# Altium PCB LKBulls2023.PcbDoc (part 2 of 2)
Units mm, origin at the board's own origin, x right, y up, seen from the top; angles counter-clockwise.
Board outline 150 x 145 mm, 2 copper layers (Top Layer, Bottom Layer), stack 1.586 mm thick; 120 components, 144 nets, 581 pads, 331 vias.
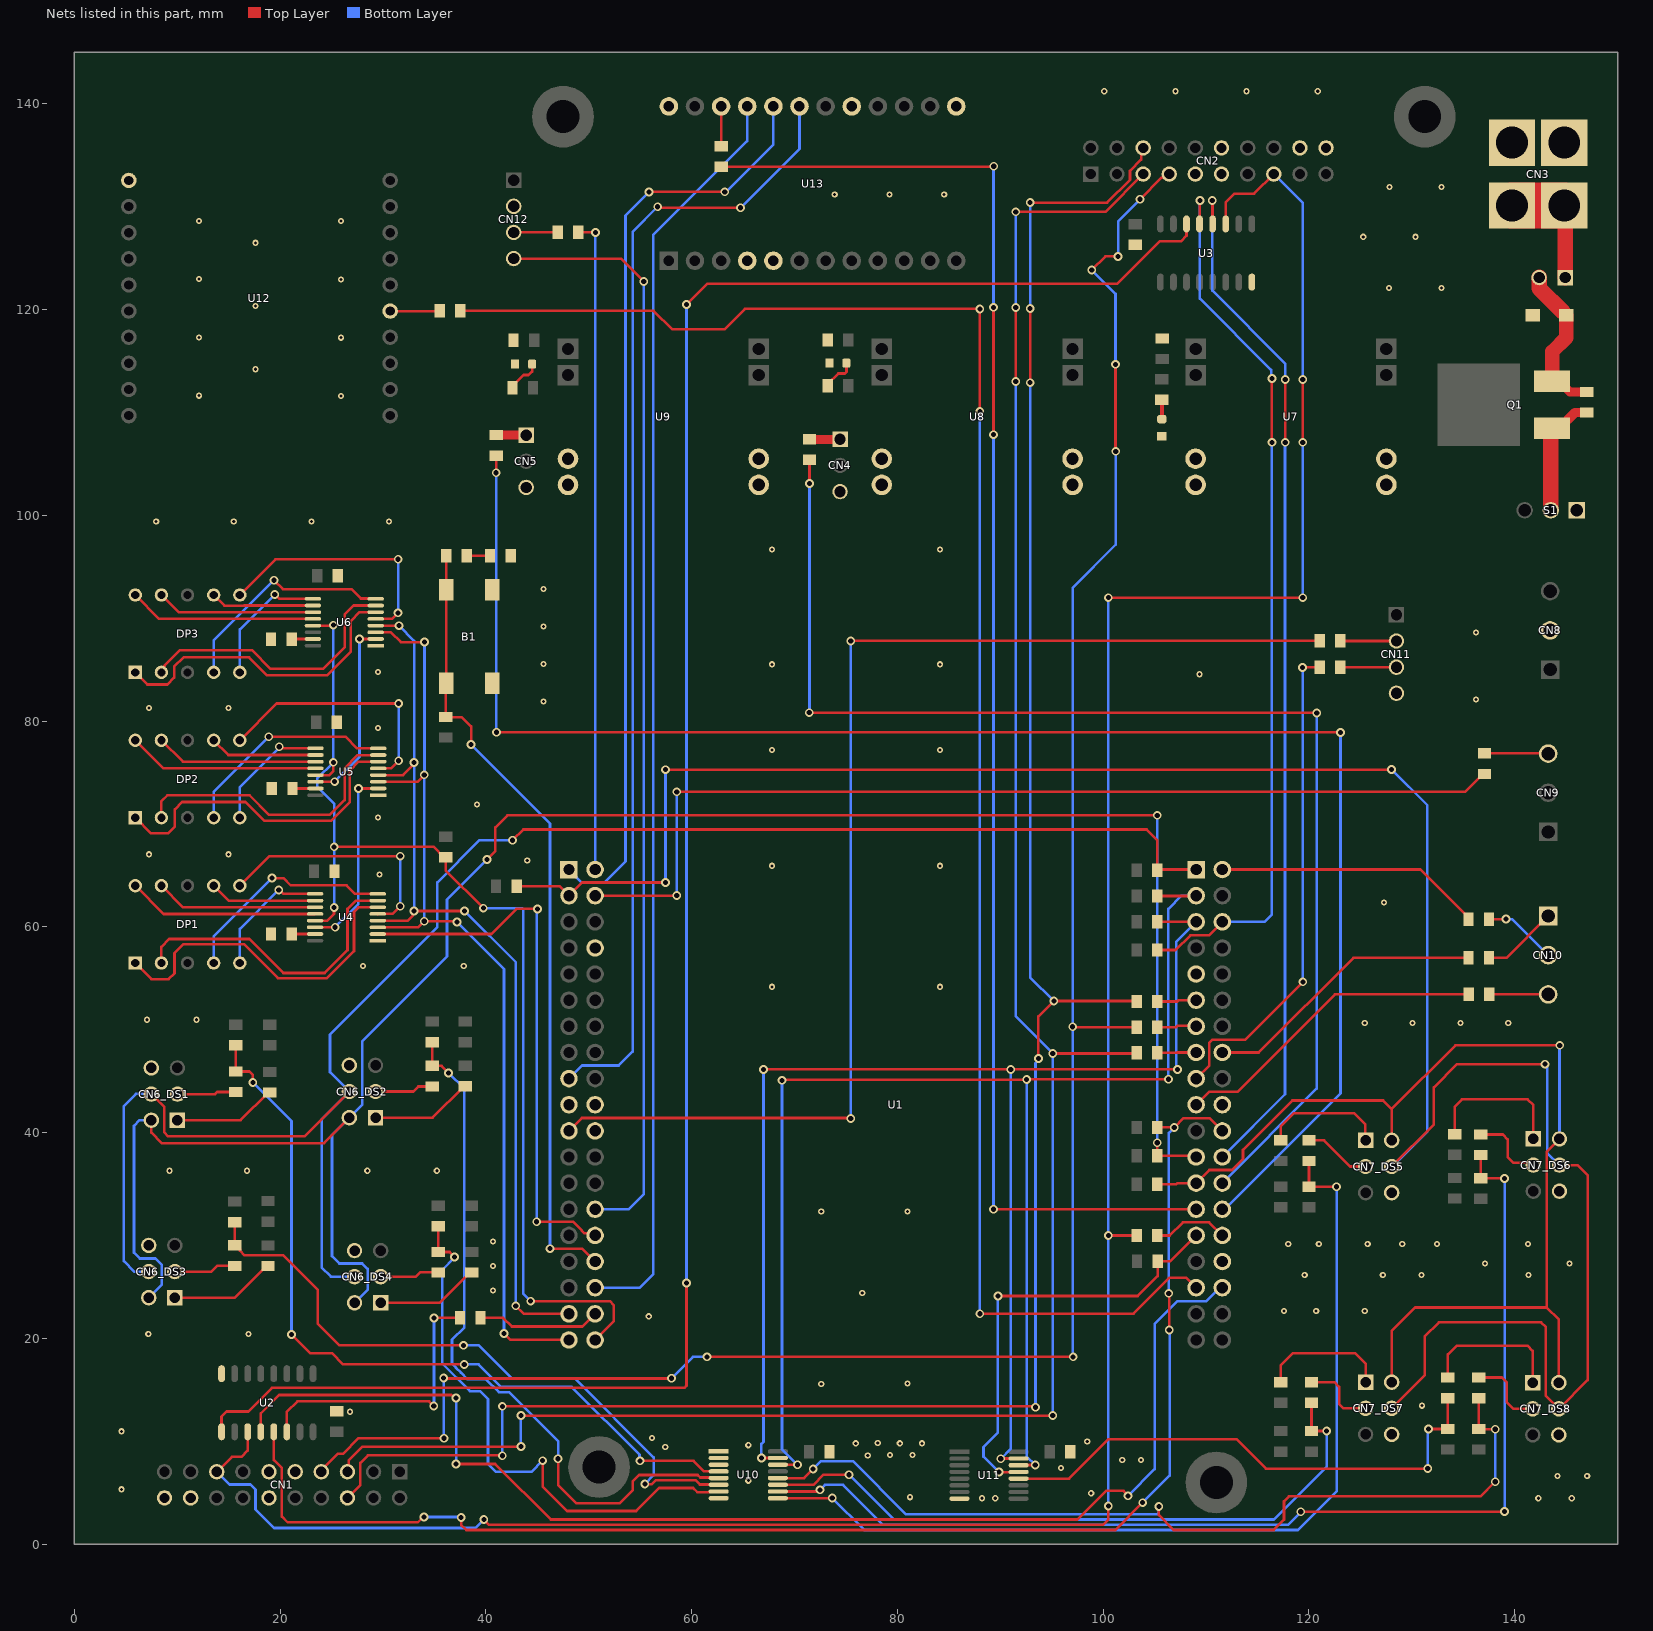
[diagram p2: the nets of this part, all layers, seen from the top]

## Via types
v1: diameter 0.85, hole 0.5, Top Layer to Bottom Layer, 172 vias
v2: diameter 0.6, hole 0.3, Top Layer to Bottom Layer, tented both sides, 121 vias
v3: diameter 0.85, hole 0.5, Top Layer to Bottom Layer, tented both sides, 38 vias

## Nets (pads, with @x,y where several pads share a name; then routed paths per layer and width w, separated by ;. In a path a pad name is that pad's centre, name@x,y a point inside that pad or via, vN(x,y) a via of type N, cw(c..) or ccw(c..) an arc to the next point about the centre after c; other vN are vias at no path point) (continued)
D\S\_\I\N\T\_\8\: R31_DS8.2 R33_DS8.2 U11.12 | length 51.3
  Top Layer w0.254: U11.12@91.775,6.375 96.683,6.375 100.512,10.204 112.961,10.204 115.824,7.341 131.521,7.341 v1(131.547,7.366) ; v1(131.623,11.201) R31_DS8.2@133.5,11.2 ; R31_DS8.2@133.5,11.2 R33_DS8.2@133.5,14.2
  Bottom Layer w0.254: v1(131.547,7.366) 131.547,11.125 v1(131.623,11.201)
D\S\_\X\S\D\N\_\1\: R28_DS1.2 R30_DS1.2 U10.4 | length 78.5
  Top Layer w0.254: R28_DS1.2@15.7,48.5 R30_DS1.2@15.7,45.95 15.85,45.95 17.017,45.95 17.348,45.618 v1(17.348,44.882) ; v1(21.107,20.371) 22.911,18.567 25.026,18.567 26.118,17.475 v1(37.897,17.475) ; v1(54.966,8.103) 60.19,8.103 61.218,7.075 U10.4@62.625,7.075
  Bottom Layer w0.254: v1(17.348,44.882) 21.107,41.123 v1(21.107,20.371) ; v1(37.897,17.475) 39.294,17.475 41.478,15.291 48.336,15.291 54.929,8.698 54.929,8.139 v1(54.966,8.103)
D\S\_\X\S\D\N\_\2\: R28_DS2.2 R30_DS2.2 U10.5 | length 69.4
  Top Layer w0.254: R28_DS2.2@34.8,48.8 34.8,46.493 R30_DS2.2@34.798,46.491 34.801,46.489 35.68,46.489 v1(36.373,45.796) ; v1(47.015,8.306) 47.015,5.74 48.793,3.962 52.984,3.962 54.28,5.258 54.28,6.131 54.88,6.731 60.586,6.731 60.834,6.484 61.681,6.484 61.707,6.457 62.593,6.457 U10.5@62.625,6.425
  Bottom Layer w0.254: v1(36.373,45.796) 37.897,44.272 37.897,21.08 36.703,19.886 36.703,17.551 37.091,17.164 37.091,17.141 37.563,16.669 37.585,16.669 38.231,16.024 40.027,16.024 41.268,14.783 42.257,14.783 47.015,10.024 v1(47.015,8.306)
D\S\_\X\S\D\N\_\3\: R28_DS3.2 R30_DS3.2 U10.6 | length 64
  Top Layer w0.254: R28_DS3.2@15.575,31.3 R30_DS3.2@15.575,29.05 15.725,29.05 16.098,28.677 16.098,28.527 16.558,28.067 20.32,28.067 23.647,24.74 23.647,21.463 25.781,19.329 v1(37.821,19.329) ; v1(55.448,5.842) 55.474,5.817 56.109,5.817 56.515,6.223 60.376,6.223 60.792,5.807 62.593,5.807 U10.6@62.625,5.775
  Bottom Layer w0.254: v1(37.821,19.329) 39.319,19.329 42.545,16.104 48.638,16.104 56.312,8.43 56.312,6.706 v1(55.448,5.842)
D\S\_\X\S\D\N\_\4\: R28_DS4.2 R30_DS4.2 U10.7 | length 55.1
  Top Layer w0.254: R28_DS4.2@35.35,30.9 R30_DS4.2@35.35,28.4 36.472,28.4 v1(36.957,27.915) ; v1(45.517,8.123) 45.517,5.588 47.879,3.226 54.61,3.226 56.845,5.461 60.147,5.461 60.542,5.066 61.681,5.066 61.707,5.093 62.593,5.093 U10.7@62.625,5.125
  Bottom Layer w0.254: v1(36.957,27.915) 36.957,27.864 35.756,26.663 35.756,17.584 38.456,14.884 39.421,14.884 40.208,14.097 40.208,7.798 40.97,7.036 44.429,7.036 v1(45.517,8.123)
D\S\_\X\S\D\N\_\5\: R32_DS5.2 R34_DS5.2 U10.9 | length 92
  Top Layer w0.254: U10.9@68.375,4.475 73.639,4.475 v1(73.66,4.496) ; R34_DS5.2@120,37.25 R32_DS5.2@120,34.75 120.003,34.747 v1(122.682,34.747)
  Bottom Layer w0.254: v1(73.66,4.496) 76.775,1.381 118.932,1.381 122.682,5.131 v1(122.682,34.747)
D\S\_\X\S\D\N\_\6\: R32_DS6.2 R34_DS6.2 U10.10 | length 110
  Top Layer w0.254: U10.10@68.375,5.125 72.147,5.125 72.305,5.283 v1(72.466,5.283) ; v1(119.202,3.15) 138.989,3.15 v1(139.014,3.175) ; R34_DS6.2@136.699,37.825 R32_DS6.2@136.699,35.575 136.713,35.56 138.989,35.56 v1(139.014,35.535)
  Bottom Layer w0.254: v1(72.466,5.283) 72.949,5.766 74.727,5.766 78.604,1.889 117.942,1.889 v1(119.202,3.15) ; v1(139.014,3.175) v1(139.014,35.535)
D\S\_\X\S\D\N\_\7\: R32_DS7.2 R34_DS7.2 U10.11 | length 65.4
  Top Layer w0.254: U10.11@68.375,5.775 71.818,5.775 72.8,6.756 v1(75.286,6.756) ; R34_DS7.2@120.25,13.75 R32_DS7.2@120.25,11 120.252,10.998 v1(121.717,10.998)
  Bottom Layer w0.254: v1(75.286,6.756) 79.645,2.397 116.595,2.397 121.717,7.518 v1(121.717,10.998)
D\S\_\X\S\D\N\_\8\: R32_DS8.2 R34_DS8.2 U10.12 | length 87.3
  Top Layer w0.254: U10.12@68.375,6.425 70.916,6.425 v1(71.806,7.315) ; v1(105.41,3.658) 105.41,2.819 106.848,1.381 116.57,1.381 117.577,2.388 117.577,4.166 118.059,4.648 136.677,4.648 v1(138.1,6.071) ; R34_DS8.2@136.5,14.2 R32_DS8.2@136.5,11.2 136.524,11.176 v1(138.1,11.176)
  Bottom Layer w0.254: v1(71.806,7.315) 72.568,8.077 75.667,8.077 80.839,2.905 105.233,2.905 105.382,3.054 105.382,3.63 v1(105.41,3.658) ; v1(138.1,6.071) v1(138.1,11.176)
D_DP_1: DP1.5 U4.9 | length 12.3
  Top Layer w0.254: v1(19.863,63.576) 19.943,63.576 20.31,63.21 U4.9@23.391,63.21
  Bottom Layer w0.254: DP1.5@16.08,56.49 16.08,59.793 v1(19.863,63.576)
D_DP_2: DP2.5 U5.9 | length 12.1
  Top Layer w0.254: v1(19.914,77.513) 20.075,77.513 20.231,77.357 U5.9@23.434,77.357
  Bottom Layer w0.254: DP2.5@16.08,70.615 16.08,73.586 19.914,77.419 v1(19.914,77.513)
D_DP_3: DP3.5 U6.9 | length 12.9
  Top Layer w0.254: v1(19.482,92.304) 19.511,92.304 19.929,91.886 U6.9@23.188,91.886
  Bottom Layer w0.254: DP3.5@16.08,84.74 16.08,88.902 v1(19.482,92.304)
E_DP_1: DP1.4 U4.8 | length 21.5
  Top Layer w0.254: v1(19.202,64.745) 20.32,64.745 21.031,64.033 26.467,64.033 27.291,63.21 U4.8@29.491,63.21
  Bottom Layer w0.254: DP1.4@13.54,56.49 13.54,59.082 v1(19.202,64.745)
E_DP_2: DP2.4 U5.8 | length 21.2
  Top Layer w0.254: v1(18.898,78.486) 26.34,78.486 27.468,77.357 U5.8@29.534,77.357
  Bottom Layer w0.254: DP2.4@13.54,70.615 13.54,73.128 v1(18.898,78.486)
E_DP_3: DP3.4 U6.8 | length 22
  Top Layer w0.254: v1(19.406,93.701) 19.406,93.69 20.259,92.837 26.924,92.837 27.838,91.923 28.559,91.923 28.577,91.905 29.27,91.905 U6.8@29.288,91.886
  Bottom Layer w0.254: DP3.4@13.54,84.74 13.54,87.86 19.38,93.701 v1(19.406,93.701)
F_DP_1: DP1.2 U4.7 | length 29.6
  Top Layer w0.254: DP1.2@8.46,56.49 8.46,58.066 9.22,58.826 17.018,58.826 20.32,55.524 24.333,55.524 26.543,57.734 26.543,61.747 27.355,62.56 U4.7@29.491,62.56
F_DP_2: DP2.2 U5.7 | length 27.9
  Top Layer w0.254: DP2.2@8.46,70.615 8.46,72.214 9.042,72.796 17.018,72.796 18.923,70.891 24.816,70.891 26.264,72.339 26.264,75.413 27.54,76.689 29.516,76.689 U5.7@29.534,76.707
F_DP_3: DP3.2 U6.7 | length 27.1
  Top Layer w0.254: DP3.2@8.46,84.74 8.46,85.023 8.759,85.322 8.759,85.391 10.262,86.893 17.272,86.893 19.075,85.09 24.184,85.09 26.264,87.169 26.264,90.348 27.152,91.236 U6.7@29.288,91.236
G_DP_1: DP1.1 U4.6 | length 33.3
  Top Layer w0.254: DP1.1@5.92,56.49 7.495,54.915 9.169,54.915 9.728,55.474 9.728,57.455 10.592,58.318 16.485,58.318 19.787,55.016 24.544,55.016 27.178,57.651 27.178,61.468 27.62,61.91 U4.6@29.491,61.91
G_DP_2: DP2.1 U5.6 | length 31.4
  Top Layer w0.254: DP2.1@5.92,70.615 7.447,69.088 9.093,69.088 9.757,69.752 9.757,71.429 10.465,72.136 16.637,72.136 18.466,70.307 24.95,70.307 26.772,72.129 26.772,75.202 27.627,76.057 U5.6@29.534,76.057
G_DP_3: DP3.1 U6.6 | length 30.6
  Top Layer w0.254: DP3.1@5.92,84.74 7.094,83.566 9.042,83.566 9.703,84.226 9.703,85.293 10.614,86.204 16.996,86.204 18.745,84.455 24.536,84.455 26.873,86.792 26.873,89.746 27.713,90.586 U6.6@29.288,90.586
GND: B1.1 B1.2 C2.1 C3.1 C4.1 C5.1 C6.1 C7.1 C8.1 C9.1 C10.1 C11.1 CN1.9 CN1.11 CN1.12 CN1.18 CN1.20 CN2.9 CN2.11 CN2.12 CN2.18 CN2.20 CN3.2 CN4.3 CN5.3 CN6_DS1.6 CN6_DS2.6 CN6_DS3.6 CN6_DS4.6 CN7_DS5.6 CN7_DS6.6 CN7_DS7.6 CN7_DS8.6 CN8.2 CN11.4 CN12.2 D1.K D2.A D3.K D4.K R2.2 R11.2 R12.2 R13.2 S1.1 U1.8 U1.19 U1.20 U1.22 U1.47 U1.58 U1.70 U2.8 U3.8 U4.1 U5.1 U6.1 U7.1 U7.2 U7.5 U7.6 U8.1 U8.2 U8.5 U8.6 U9.1 U9.2 U9.5 U9.6 U10.1 U10.2 U10.3 U10.8 U11.8 U12.1 U13.4 U13.5 U13.13 U13.17 U13.24
  other v2: 88.214,4.47 89.51,4.47 142.291,4.47 145.542,4.47 81.229,4.572 98.831,4.953 4.572,5.334 65.507,6.172 144.17,6.629 147.041,6.629 95.91,7.417 101.854,8.179 103.657,8.179 77.114,8.636 79.286,8.661 81.458,8.661 57.429,9.449 65.507,9.623 75.946,9.804 80.23,9.804 82.372,9.804 78.088,9.83 98.45,9.982 56.159,10.338 4.572,10.973 26.797,12.878 130.988,13.462 72.593,15.57 80.975,15.621 7.188,20.447 16.916,20.447 55.829,22.149 117.577,22.682 120.701,22.682 125.425,22.682 76.581,24.409 40.691,24.663 119.583,26.162 127.178,26.162 130.937,26.162 141.351,26.162 40.691,27.038 137.109,27.28 145.313,27.28 117.983,29.185 120.955,29.185 125.705,29.185 129.07,29.185 132.436,29.185 141.275,29.185 40.691,29.413 72.593,32.334 80.975,32.334 9.246,36.297 16.789,36.297 28.473,36.297 35.23,36.297 125.425,50.673 130.073,50.673 134.722,50.673 139.37,50.673 7.061,50.978 11.862,50.978 67.818,54.178 84.15,54.178 28.067,56.21 37.846,56.21 127.279,62.357 29.642,65.1 67.818,65.938 84.15,65.938 44.018,66.446 7.264,67.056 14.986,67.056 29.515,70.637 39.141,71.882 67.818,77.191 84.15,77.191 29.515,79.324 7.264,81.28 14.986,81.28 45.593,81.915 136.22,82.093 109.347,84.557 29.515,84.785 67.818,85.522 84.15,85.522 45.593,85.556 136.22,88.621 45.593,89.196 45.593,92.837 67.818,96.672 84.15,96.672 7.95,99.412 15.494,99.412 23.038,99.412 30.582,99.412 25.908,111.608 12.116,111.633 17.602,114.198 25.908,117.272 12.116,117.297 17.602,120.345 127.787,122.098 132.867,122.098 25.908,122.936 12.116,122.961 17.602,126.492 125.273,127.076 130.353,127.076 25.908,128.6 12.116,128.626 73.901,131.191 79.223,131.191 84.544,131.191 127.813,131.902 132.893,131.902 100.101,141.224 107.019,141.224 113.936,141.224 120.853,141.224
NetC1_1: C1.1 R2.1 | length 2.3
  Top Layer w0.254: C1.1@38.135,96.088 R2.1@40.402,96.088
NetCN1_5: CN1.5 CN2.5 R5.1 | length 213.7
  Top Layer w0.254: CN1.5@26.54,7.04 26.671,7.171 26.671,8.171 27.963,9.463 43.363,9.463 v3(43.4,9.5) ; v3(43.4,12.5) v3(95.1,12.5) ; v3(91.5,113) v3(91.5,120.2) ; v3(91.5,129.5) 100.205,129.5 CN2.5@103.88,133.175 ; v3(95.1,47.7) 103.2,47.7 R5.1@103.25,47.75
  Bottom Layer w0.254: v3(43.4,9.5) v3(43.4,12.5) ; v3(91.5,113) 91.5,51.3 v3(95.1,47.7) 95.084,47.684 95.084,12.516 v3(95.1,12.5) ; v3(91.5,120.2) v3(91.5,129.5)
NetCN1_6: CN1.6 CN2.6 R7.1 | length 215.8
  Top Layer w0.254: CN1.6@26.54,4.5 27.8,5.76 27.8,7.9 28.528,8.628 41.572,8.628 v3(41.6,8.6) ; v3(41.6,13.4) 93.331,13.4 v3(93.421,13.31) ; v3(92.9,112.9) v3(92.9,120.1) ; v3(92.9,130.4) 100.387,130.4 102.6,132.613 102.6,133.494 103.69,134.584 103.69,135.525 CN2.6@103.88,135.715 ; v3(93.7,47.2) 93.7,51.3 v3(95.2,52.8) 103.2,52.8 R7.1@103.25,52.75
  Bottom Layer w0.254: v3(41.6,8.6) v3(41.6,13.4) ; v3(92.9,112.9) 92.9,55.1 v3(95.2,52.8) ; v3(92.9,120.1) v3(92.9,130.4) ; v3(93.421,13.31) 93.421,46.76 93.7,47.039 v3(93.7,47.2)
NetCN1_7: CN1.7 CN2.7 R6.1 | length 209.3
  Top Layer w0.254: CN1.7@24,7.04 24,7.199 25.589,8.788 26.088,8.788 27.612,10.312 35.908,10.312 v1(35.916,10.305) ; v1(35.89,16.154) 35.941,16.104 58.014,16.104 v1(58.039,16.129) ; v1(61.484,18.212) v1(97.079,18.212) ; v1(97.028,50.292) 97.07,50.25 R6.1@103.25,50.25 ; v1(98.882,123.85) 100.203,125.171 v1(101.448,125.171) ; v1(101.194,114.681) 101.194,106.248 v1(101.219,106.223) ; v1(103.585,130.72) 105.684,132.819 105.727,132.819 106.083,133.175 CN2.7@106.42,133.175
  Bottom Layer w0.254: v1(35.89,16.154) 35.916,16.129 v1(35.916,10.305) ; v1(58.039,16.129) 60.122,18.212 v1(61.484,18.212) ; v1(97.079,18.212) 97.028,18.263 97.028,92.964 101.219,97.155 v1(101.219,106.223) ; v1(98.882,123.85) 101.194,121.539 v1(101.194,114.681) ; v1(101.448,125.171) 101.448,128.583 v1(103.585,130.72)
NetCN1_15: CN1.15 CN2.15 R4.1 U2.11 U3.11 | length 258
  Top Layer w0.254: CN1.15@13.84,7.04 15.3,8.5 16.254,8.5 16.845,9.091 U2.11@16.845,10.925 ; v1(39.8,2.4) 39.803,2.4 40.314,1.889 99.986,1.889 100.508,2.41 100.508,3.703 v1(100.5,3.711) ; v1(100.5,30) R4.1@103.25,30 ; v1(100.5,92) v1(119.4,92) ; U3.11@111.905,128.325 111.905,130.412 112.759,131.266 114.671,131.266 CN2.15@116.58,133.175 ; v1(119.4,107.1) v1(119.4,113.2)
  Bottom Layer w0.254: CN1.15@13.84,7.04 15.08,5.8 17.1,5.8 17.6,5.3 17.6,3.38 19.406,1.575 38.975,1.575 v1(39.8,2.4) ; v1(100.5,3.711) v1(100.5,92) ; CN2.15@116.58,133.175 119.4,130.355 v1(119.4,113.2) ; v1(119.4,92) v1(119.4,107.1)
NetCN3_1: CN3.1 F1.1 | length 12.1
  Top Layer w1.499: F1.1@144.907,123.114 CN3.1@144.907,130.035
  Top Layer w1.524: CN3.1@144.815,130.127 CN3.1@144.907,130.035
  Top Layer w4.445: CN3.1@139.735,130.127 CN3.1@144.815,130.127
NetCN4_1: CN4.1 R18.2 | length 3
  Top Layer w0.889: R18.2@71.45,107.401 71.46,107.391 CN4.1@74.422,107.391
NetCN5_1: CN5.1 R19.2 | length 3
  Top Layer w0.889: R19.2@40.98,107.798 CN5.1@43.917,107.798 ; R19.2@41.021,107.832 R19.2@41.056,107.798
NetCN6_DS1_1: CN6_DS1.1 R29_DS1.1 | length 10.1
  Top Layer w0.254: CN6_DS1.1@10.02,41.21 16.16,41.21 18.85,43.9 R29_DS1.1@19,43.9
NetCN6_DS1_2: CN6_DS1.2 CN6_DS2.2 CN6_DS3.2 CN6_DS4.2 R23.1 U1.61 | length 200.9
  Top Layer w0.254: CN6_DS1.2@7.48,41.21 7.48,39.993 8.484,38.989 24.259,38.989 CN6_DS2.2@26.73,41.46 ; v1(40.107,66.548) 40.919,67.361 40.919,69.672 42.088,70.841 v1(105.258,70.841) ; v1(105.258,39.014) 105.258,37.758 R23.1@105.25,37.75 108.92,37.75 U1.61@109.035,37.635
  Bottom Layer w0.254: CN6_DS3.2@7.23,23.96 8.509,25.239 8.509,27.127 7.866,27.77 6.368,27.77 5.791,28.346 5.791,40.665 6.336,41.21 CN6_DS1.2@7.48,41.21 ; CN6_DS4.2@27.23,23.46 28.499,24.729 28.499,26.75 27.969,27.28 25.756,27.28 25.044,27.991 25.044,39.774 CN6_DS2.2@26.73,41.46 27.991,42.721 27.991,48.895 36.22,57.125 36.22,62.662 v1(40.107,66.548) ; v1(105.258,39.014) v1(105.258,70.841) v1@105.283,70.866
NetCN6_DS1_3: CN6_DS1.3 R30_DS1.1 | length 5.8
  Top Layer w0.254: CN6_DS1.3@10.02,43.75 13.676,43.75 13.876,43.95 R30_DS1.1@15.7,43.95
NetCN6_DS1_4: CN6_DS1.4 CN6_DS2.4 CN6_DS3.4 CN6_DS4.4 R22.1 U1.39 | length 171.8
  Top Layer w0.254: CN6_DS1.4@7.48,43.75 8.738,42.492 8.738,40.03 9.119,39.649 22.379,39.649 CN6_DS2.4@26.73,44 ; v1(42.596,68.428) 43.637,69.469 104.216,69.469 105.25,68.435 R22.1@105.25,65.5 105.325,65.575 U1.39@109.035,65.575
  Bottom Layer w0.254: CN6_DS3.4@7.23,26.5 5.809,26.5 4.801,27.508 4.801,42.57 5.994,43.764 7.466,43.764 CN6_DS1.4@7.48,43.75 ; CN6_DS4.4@27.23,26 24.933,26 24.028,26.905 24.028,41.298 CN6_DS2.4@26.73,44 24.841,45.889 24.841,49.53 35.281,59.969 35.281,64.338 39.37,68.428 v1(42.596,68.428)
NetCN6_DS2_1: CN6_DS2.1 R29_DS2.1 | length 10
  Top Layer w0.254: CN6_DS2.1@29.27,41.46 34.81,41.46 37.85,44.5 R29_DS2.1@38,44.5
NetCN6_DS2_3: CN6_DS2.3 R30_DS2.1 | length 5.8
  Top Layer w0.254: CN6_DS2.3@29.27,44 32.951,44 33.442,44.491 R30_DS2.1@34.798,44.491 R30_DS2.1@34.773,44.467
NetCN6_DS3_1: CN6_DS3.1 R29_DS3.1 | length 10.3
  Top Layer w0.254: CN6_DS3.1@9.77,23.96 15.59,23.96 18.671,27.042 R29_DS3.1@18.821,27.042
NetCN6_DS3_3: CN6_DS3.3 R30_DS3.1 | length 6
  Top Layer w0.254: CN6_DS3.3@9.77,26.5 13.317,26.5 13.868,27.051 R30_DS3.1@15.575,27.05 R30_DS3.1@15.575,27.05
NetCN6_DS4_1: CN6_DS4.1 R29_DS4.1 | length 10.1
  Top Layer w0.254: CN6_DS4.1@29.77,23.46 35.511,23.46 38.458,26.407 R29_DS4.1@38.608,26.407
NetCN6_DS4_3: CN6_DS4.3 R30_DS4.1 | length 5.8
  Top Layer w0.254: CN6_DS4.3@29.77,26 33.188,26 33.604,26.416 35.334,26.416 R30_DS4.1@35.35,26.4
NetCN7_DS5_1: CN7_DS5.1 R33_DS5.1 | length 12.1
  Top Layer w0.254: R33_DS5.1@117.25,39.25 117.25,40.618 118.516,41.885 124.409,41.885 125.476,40.818 125.476,39.274 CN7_DS5.1@125.5,39.25
NetCN7_DS5_2: CN7_DS5.2 CN7_DS6.2 CN7_DS7.2 CN7_DS8.2 R25.1 U1.63 | length 103.7
  Top Layer w0.254: R25.1@105.25,35 107.111,35 107.206,35.095 U1.63@109.035,35.095 110.313,36.373 112.497,36.373 113.585,37.461 113.585,38.325 118.389,43.129 127.203,43.129 128.04,42.292 ; CN7_DS7.2@128.04,15.75 128.04,20.725 130.327,23.012 143.104,23.012 ; CN7_DS5.2@128.04,39.25 128.04,42.292 ; CN7_DS8.2@144.29,15.7 144.29,21.303 144.29,21.826 143.104,23.012 ; CN7_DS6.2@144.35,39.39 143.104,38.144 143.104,23.012 ; v1(144.374,48.489) 134.236,48.489 128.04,42.292
  Bottom Layer w0.254: CN7_DS6.2@144.35,39.39 144.35,48.465 v1(144.374,48.489)
NetCN7_DS5_3: CN7_DS5.3 R34_DS5.1 | length 6.6
  Top Layer w0.254: R34_DS5.1@120,39.25 121.456,39.25 123.996,36.71 CN7_DS5.3@125.5,36.71
NetCN7_DS5_4: CN7_DS5.4 CN7_DS6.4 CN7_DS7.4 CN7_DS8.4 R24.1 U1.3 | length 226.6
  Top Layer w0.254: R24.1@42.986,63.957 47.153,63.957 U1.3@48.075,63.035 49.353,64.313 v1(57.455,64.313) ; v1(57.455,75.286) 127.991,75.286 v1(128.016,75.311) ; CN7_DS7.4@128.04,13.21 131.242,16.412 131.242,20.168 132.639,21.565 142.57,21.565 143.027,21.107 143.027,14.423 CN7_DS8.4@144.29,13.16 147.091,15.961 147.091,35.865 146.106,36.85 CN7_DS6.4@144.35,36.85 ; CN7_DS5.4@128.04,36.71 132.131,40.801 132.131,44.399 134.391,46.66 v1(142.951,46.66)
  Bottom Layer w0.254: v1(57.455,64.313) v1(57.455,75.286) ; v1(128.016,75.311) 131.496,71.831 131.496,40.081 128.125,36.71 CN7_DS5.4@128.04,36.71 ; CN7_DS7.4@128.04,13.21 CN7_DS7.4@128.297,13.21 ; v1(142.951,46.66) 142.951,46.499 143.154,46.295 143.154,38.046 CN7_DS6.4@144.35,36.85
NetCN7_DS6_1: CN7_DS6.1 R33_DS6.1 | length 14.1
  Top Layer w0.254: R33_DS6.1@134.162,39.85 134.162,42.518 134.874,43.231 141.249,43.231 141.81,42.67 CN7_DS6.1@141.81,39.39
NetCN7_DS6_3: CN7_DS6.3 R34_DS6.1 | length 7.4
  Top Layer w0.254: R34_DS6.1@136.699,39.825 138.835,39.825 139.319,39.341 139.319,37.617 139.869,37.067 141.593,37.067 CN7_DS6.3@141.81,36.85
NetCN7_DS7_1: CN7_DS7.1 R33_DS7.1 | length 12.6
  Top Layer w0.254: R33_DS7.1@117.25,15.75 117.25,17.377 118.415,18.542 124.511,18.542 125.5,17.553 CN7_DS7.1@125.5,15.75
NetCN7_DS7_3: CN7_DS7.3 R34_DS7.1 | length 7.3
  Top Layer w0.254: R34_DS7.1@120.25,15.75 122.477,15.75 122.936,15.291 122.936,13.614 123.34,13.21 CN7_DS7.3@125.5,13.21
NetCN7_DS8_1: CN7_DS8.1 R33_DS8.1 | length 14.1
  Top Layer w0.254: R33_DS8.1@133.5,16.2 133.5,18.438 134.366,19.304 141.224,19.304 141.75,18.778 CN7_DS8.1@141.75,15.7
NetCN7_DS8_3: CN7_DS8.3 R34_DS8.1 | length 7.6
  Top Layer w0.254: R34_DS8.1@136.5,16.2 138.765,16.2 139.217,15.748 139.217,13.843 139.9,13.16 CN7_DS8.3@141.75,13.16
NetCN9_3: CN9.3 R35.2 | length 6.2
  Top Layer w0.254: R35.2@137.058,76.87 CN9.3@143.227,76.87
NetCN10_1: CN10.1 R36.2 | length 7.4
  Top Layer w0.254: R36.2@137.5,57 139.19,57 CN10.1@143.25,61.06
NetCN10_2: CN10.2 R37.2 | length 7.2
  Top Layer w0.254: R37.2@137.507,60.757 v1(139.141,60.757)
  Bottom Layer w0.254: v1(139.141,60.757) 139.743,60.757 CN10.2@143.25,57.25
NetCN10_3: CN10.3 R38.2 | length 5.7
  Top Layer w0.254: R38.2@137.527,53.44 CN10.3@143.25,53.44
NetCN11_2: CN11.2 R39.2 | length 5.4
  Top Layer w0.254: R39.2@123.065,87.79 CN11.2@128.5,87.79
NetCN11_3: CN11.3 R40.2 | length 5.5
  Top Layer w0.254: R40.2@123.047,85.242 123.055,85.25 CN11.3@128.5,85.25
NetCN12_3: CN12.3 R42.2 | length 4.3
  Top Layer w0.254: CN12.3@42.7,127.5 R42.2@46.973,127.5
NetCN12_4: CN12.4 U1.28 | length 107.6
  Top Layer w0.254: CN12.4@42.7,124.96 53.119,124.96 v1(55.347,122.733)
  Bottom Layer w0.254: U1.28@50.615,32.555 53.84,32.555 55.347,34.061 v1(55.347,122.733)
NetD1_1: D1.A R14.1 | length 1.9
  Top Layer w0.406: D1.A@105.7,109.35 R14.1@105.7,111.225
NetD2_K: D2.K F1.2 Q1.3 R15.2 | length 15.6
  Top Layer w0.889: Q1.3@143.612,113.036 144.322,113.036 145.358,112 R15.2@147,112
  Top Layer w1.016: D2.K@144.704,119.736 144.729,119.736 D2.K@145.009,119.456
  Top Layer w1.397: Q1.3@143.612,113.036 143.662,113.086 143.662,113.665 143.662,115.926 145.009,117.272 D2.K@145.009,119.456
  Top Layer w1.524: F1.2@142.367,123.114 142.367,122.072 D2.K@144.704,119.736
NetD3_1: D3.A R16.1 | length 3.3
  Top Layer w0.254: R16.1@73.219,112.598 73.219,112.748 74.263,113.792 74.895,113.792 75.044,113.941 D3.A@75.044,114.808
NetD4_1: D4.A R17.1 | length 3.3
  Top Layer w0.254: R17.1@42.586,112.42 R17.1@42.661,112.495 ; R17.1@42.586,112.57 43.656,113.64 44.145,113.64 44.488,113.982 D4.A@44.488,114.706
NetDP1_6: DP1.6 U4.5 | length 24.1
  Top Layer w0.254: DP1.6@16.08,64.01 18.948,66.878 v1(31.674,66.878) ; U4.5@29.491,61.26 29.497,61.265 30.937,61.265 v1(31.674,62.001)
  Bottom Layer w0.254: v1(31.674,62.001) v1(31.674,66.878)
NetDP1_7: DP1.7 U4.10 | length 10.5
  Top Layer w0.254: DP1.7@13.54,64.01 14.99,62.56 U4.10@23.391,62.56
NetDP1_9: DP1.9 U4.11 | length 15.8
  Top Layer w0.254: DP1.9@8.46,64.01 10.56,61.91 U4.11@23.391,61.91
NetDP1_10: DP1.10 U4.12 | length 18.6
  Top Layer w0.254: DP1.10@5.92,64.01 8.67,61.26 U4.12@23.391,61.26
NetDP2_6: DP2.6 U5.5 | length 24.8
  Top Layer w0.254: DP2.6@16.08,78.135 19.657,81.712 v1(31.521,81.712) ; U5.5@29.534,75.407 29.539,75.413 30.785,75.413 v1(31.521,76.149)
  Bottom Layer w0.254: v1(31.521,76.149) v1(31.521,81.712)
NetDP2_7: DP2.7 U5.10 | length 10.5
  Top Layer w0.254: DP2.7@13.54,78.135 14.968,76.707 U5.10@23.434,76.707
NetDP2_9: DP2.9 U5.11 | length 15.8
  Top Layer w0.254: DP2.9@8.46,78.135 10.538,76.057 U5.11@23.434,76.057
NetDP2_10: DP2.10 U5.12 | length 18.6
  Top Layer w0.254: DP2.10@5.92,78.135 8.648,75.407 U5.12@23.434,75.407
NetDP3_6: DP3.6 U6.5 | length 24.4
  Top Layer w0.254: DP3.6@16.08,92.26 19.553,95.733 v1(31.471,95.733) ; U6.5@29.288,89.936 29.293,89.941 30.861,89.941 v1(31.445,90.526)
  Bottom Layer w0.254: v1(31.445,90.526) 31.471,90.551 v1(31.471,95.733)
NetDP3_7: DP3.7 U6.10 | length 10.1
  Top Layer w0.254: DP3.7@13.54,92.26 14.571,91.229 16.507,91.229 16.514,91.236 U6.10@23.188,91.236
NetDP3_9: DP3.9 U6.11 | length 15.4
  Top Layer w0.254: DP3.9@8.46,92.26 10.134,90.586 U6.11@23.188,90.586
NetDP3_10: DP3.10 U6.12 | length 18.2
  Top Layer w0.254: DP3.10@5.92,92.26 8.244,89.936 U6.12@23.188,89.936
NetQ1_1: Q1.1 R15.1 S1.2 | length 12
  Top Layer w0.889: Q1.1@143.612,108.464 144.322,108.464 145.858,110 R15.1@147,110
  Top Layer w1.524: S1.2@143.5,100.5 143.514,100.514 143.514,108.366 Q1.1@143.612,108.464
NetR3_1: R3.1 U2.14 | length 27.9
  Top Layer w0.254: U2.14@20.655,10.925 20.655,12.883 21.666,13.894 34.468,13.894 v1(34.925,13.437) ; v1(34.95,21.996) R3.1@37.481,21.996 R3.1@37.477,21.993
  Bottom Layer w0.254: v1(34.925,13.437) 34.95,13.462 v1(34.95,21.996)
NetR3_2: R3.2 U1.36 | length 12
  Top Layer w0.254: R3.2@39.481,21.996 41.681,21.996 42.514,21.164 49.384,21.164 U1.36@50.615,22.395
NetR4_2: R4.2 U1.68 | length 7.4
  Top Layer w0.254: R4.2@105.25,30 106.454,30 107.747,31.293 110.297,31.293 U1.68@111.575,30.015
NetR5_2: R5.2 U1.53 | length 3.8
  Top Layer w0.254: R5.2@105.25,47.75 107.161,47.75 107.206,47.795 U1.53@109.035,47.795
NetR6_2: R6.2 U1.51 | length 3.9
  Top Layer w0.254: R6.2@105.25,50.25 107.095,50.25 107.239,50.394 U1.51@108.976,50.394 ; U1.51@108.95,50.25 U1.51@109.035,50.335
NetR7_2: R7.2 U1.49 | length 3.8
  Top Layer w0.254: R7.2@105.25,52.75 107.208,52.75 107.333,52.875 U1.49@109.035,52.875
NetR8_1: R8.1 U1.60 U2.13 | length 139.7
  Top Layer w0.254: U2.13@19.385,10.925 19.385,8.174 20.168,7.392 20.168,2.692 20.726,2.134 33.386,2.134 33.894,2.642 v1(33.985,2.642) ; v1(37.592,2.591) 37.592,1.88 38.091,1.381 101.178,1.381 v1(103.835,4.039) ; R8.1@105.25,40.5 105.263,40.513 v1(106.909,40.513) 107.802,41.406 109.545,41.406 109.549,41.402 110.348,41.402 U1.60@111.575,40.175 ; v1(106.375,24.384) 106.426,24.333 v1(106.426,20.828)
  Bottom Layer w0.254: v1(33.985,2.642) 37.541,2.642 v1(37.592,2.591) ; v1(103.835,4.039) 106.451,6.655 106.451,20.803 v1(106.426,20.828) ; v1(106.375,24.384) 106.375,39.98 v1(106.909,40.513)
NetR9_1: R9.1 U1.44 U3.13 | length 87.2
  Top Layer w0.254: R9.1@105.25,57.75 107.031,57.75 108.467,59.186 110.266,59.186 U1.44@111.575,60.495 ; U3.13@109.365,128.325 109.382,128.342 109.382,130.582 v3(109.4,130.6) ; v3(116.4,107.1) v3(116.4,113.3)
  Bottom Layer w0.254: v3(109.4,130.6) 109.4,121.08 116.327,114.152 116.327,113.373 v3(116.4,113.3) ; U1.44@111.575,60.495 115.695,60.495 116.4,61.2 v3(116.4,107.1)
NetR10_1: R10.1 U1.38 U4.13 U5.13 U6.13 | length 108.7
  Top Layer w0.254: U6.13@23.188,89.286 25.126,89.286 v1(25.171,89.332) ; U4.13@23.391,60.61 24.592,60.61 25.236,61.254 25.236,61.863 v1(25.248,61.874) ; U5.13@23.434,74.757 24.782,74.757 25.171,75.147 v1(25.171,75.997) ; v1(25.248,67.783) 25.257,67.793 34.918,67.793 35.943,66.767 R10.1@36.093,66.767 36.093,65.481 v1(39.751,61.824) ; v1(44.348,23.622) 47.695,23.622 47.699,23.626 52.041,23.626 52.426,23.241 52.426,21.666 U1.38@50.615,19.855
  Bottom Layer w0.254: v1(25.171,89.332) v1(25.171,75.997) 23.597,74.422 23.597,73.635 25.248,71.984 v1(25.248,67.783) v1(25.248,61.874) ; v1(39.751,61.824) 43.488,61.824 43.637,61.675 43.637,24.333 v1(44.348,23.622)
NetR11_1: R11.1 U4.15 | length 2.3
  Top Layer w0.254: R11.1@21.117,59.334 21.142,59.31 U4.15@23.391,59.31
NetR12_1: R12.1 U5.15 | length 2.2
  Top Layer w0.254: R12.1@21.193,73.457 U5.15@23.434,73.457
NetR13_1: R13.1 U6.15 | length 2.4
  Top Layer w0.254: R13.1@21.327,87.75 R13.1@21.117,87.96 21.143,87.986 U6.15@23.188,87.986
NetR18_1: R18.1 U1.64 | length 123.4
  Top Layer w0.254: v1(71.425,80.823) 120.726,80.823 v1(120.752,80.797) ; v1(71.45,103.099) R18.1@71.45,105.401
  Bottom Layer w0.254: v1(71.425,80.823) 71.45,80.848 v1(71.45,103.099) ; U1.64@111.575,35.095 120.752,44.272 v1(120.752,80.797)
NetR19_1: R19.1 U1.66 | length 160.2
  Top Layer w0.254: v1(40.996,104.14) R19.1@40.996,105.807 ; v1(41.021,78.918) 123.038,78.918 v1(123.063,78.892)
  Bottom Layer w0.254: v1(40.996,104.14) 40.996,78.943 v1(41.021,78.918) ; U1.66@111.575,32.555 111.803,32.555 123.063,43.815 v1(123.063,78.892)
NetR20_1: R20.1 U1.43 U10.15 U11.15 | length 138.7
  Top Layer w0.254: v1(66.777,8.382) 68.368,8.382 U10.15@68.375,8.375 ; v1(66.98,46.152) v1(91.008,46.152) v1(107.213,46.152) ; v1(90.043,8.306) 90.062,8.325 U11.15@91.775,8.325 ; R20.1@105.25,60.5 109.03,60.5 U1.43@109.035,60.495
  Bottom Layer w0.254: v1(66.777,8.382) 66.777,9.754 66.98,9.957 v1(66.98,46.152) ; v1(90.043,8.306) 91.008,9.271 v1(91.008,46.152) ; v1(107.213,46.152) 107.099,46.266 107.099,46.586 107.086,46.599 107.086,58.546 U1.43@109.035,60.495
NetR21_1: R21.1 U1.41 U10.14 U11.14 | length 140.6
  Top Layer w0.254: U10.14@68.375,7.725 70.278,7.725 v1(70.282,7.722) ; v1(68.783,45.085) 68.859,45.161 v1(92.558,45.161) 92.583,45.187 v1(106.35,45.187) ; U11.14@91.775,7.675 91.797,7.696 v1(93.396,7.696) ; R21.1@105.25,63 109,63 U1.41@109.035,63.035
  Bottom Layer w0.254: v1(68.783,45.085) 68.783,9.22 v1(70.282,7.722) ; v1(92.558,45.161) 92.558,8.534 v1(93.396,7.696) ; v1(106.35,45.187) 106.324,45.212 106.324,61.747 107.612,63.035 U1.41@109.035,63.035
NetR26_1: R26.1 U1.67 U11.13 | length 42.8
  Top Layer w0.254: v1(89.764,24.13) 103.353,24.13 105.292,26.07 R26.1@105.292,27.508 106.528,27.508 U1.67@109.035,30.015 ; v1(89.865,7.01) 91.761,7.01 U11.13@91.775,7.025
  Bottom Layer w0.254: v1(89.764,24.13) 89.764,10.846 88.367,9.449 88.367,8.509 v1(89.865,7.01)
NetR35_1: R35.1 U1.4 | length 97.1
  Top Layer w0.254: U1.4@50.836,62.814 51.064,63.043 v1(58.547,63.043) ; v1(58.547,73.127) 135.165,73.127 136.908,74.87 R35.1@137.058,74.87
  Bottom Layer w0.254: v1(58.547,63.043) v1(58.547,73.127)
NetR36_1: R36.1 U1.54 | length 27.7
  Top Layer w0.254: U1.54@111.575,47.795 115.105,47.795 124.31,57 R36.1@135.5,57
NetR37_1: R37.1 U1.40 | length 25.9
  Top Layer w0.254: U1.40@111.575,65.575 130.825,65.575 R37.1@135.5,60.9
NetR38_1: R38.1 U1.57 | length 30.6
  Top Layer w0.254: U1.57@109.252,42.932 110.313,43.993 113.081,43.993 122.53,53.442 R38.1@135.525,53.442
NetR39_1: R39.1 U1.21 | length 119.9
  Top Layer w0.254: U1.21@48.075,40.175 49.327,41.427 75.413,41.427 v1(75.463,41.377) ; v1(75.463,87.782) 75.489,87.808 R39.1@121.047,87.808
  Bottom Layer w0.254: v1(75.463,41.377) v1(75.463,87.782)
NetR40_1: R40.1 U1.55 | length 47.8
  Top Layer w0.254: U1.55@109.035,45.255 110.312,46.532 110.312,48.743 110.596,49.026 113.771,49.026 v1(119.405,54.661) ; v1(119.38,85.217) 119.405,85.242 R40.1@121.047,85.242
  Bottom Layer w0.254: v1(119.38,85.217) 119.38,54.686 v1(119.405,54.661)
NetR41_1: R41.1 U12.12 | length 4.8
  Top Layer w0.254: U12.12@30.69,119.856 35.468,119.856 R41.1@35.5,119.888
NetR41_2: R41.2 U1.71 | length 172.6
  Top Layer w0.254: R41.2@37.5,119.888 56.312,119.888 58.115,118.085 63.195,118.085 65.176,120.066 v1(88.011,120.066) v1(88.011,110.109) ; v1(88.011,22.403) 102.946,22.403 106.451,25.908 108.062,25.908 U1.71@109.035,24.935
  Bottom Layer w0.254: v1(88.011,22.403) v1(88.011,110.109)
NetR42_1: R42.1 U1.2 | length 63.2
  Top Layer w0.254: R42.1@48.981,127.508 50.622,127.508 v1(50.648,127.483)
  Bottom Layer w0.254: U1.2@50.615,65.966 50.615,127.45 v1(50.648,127.483)
NetR43_1: R43.1 U13.22 | length 3.9
  Top Layer w0.254: R43.1@62.865,135.874 U13.22@62.865,139.745
NetR43_2: R43.2 U1.65 | length 147.6
  Top Layer w0.254: R43.2@62.916,133.874 89.297,133.874 v1(89.357,133.934) ; v1(89.332,107.848) v1(89.332,120.218) ; v1(89.338,32.557) 89.339,32.555 U1.65@109.035,32.555
  Bottom Layer w0.254: v1(89.332,107.848) 89.338,107.842 v1(89.338,32.557) ; v1(89.332,120.218) 89.332,133.909 v1(89.357,133.934)
NetU1_1: U1.1 U13.20 | length 89.6
  Top Layer w0.254: v1(55.855,131.42) 55.88,131.445 v1(63.221,131.445)
  Bottom Layer w0.254: U1.1@48.798,64.852 48.798,64.816 49.327,64.287 51.486,64.287 53.569,66.37 53.569,129.134 v1(55.855,131.42) ; v1(63.221,131.445) 63.322,131.445 67.94,136.063 U13.20@67.94,139.75
NetU1_17: U1.17 U13.19 | length 110.7
  Top Layer w0.254: v1(56.693,129.997) 56.794,129.896 v1(64.745,129.896)
  Bottom Layer w0.254: U1.17@48.075,45.255 49.353,46.533 52.908,46.533 54.254,47.879 54.254,127.559 v1(56.693,129.997) ; v1(64.745,129.896) 70.48,135.631 U13.19@70.48,139.75
NetU1_30: U1.30 U4.2 | length 53.2
  Top Layer w0.254: U4.2@29.491,59.31 40.539,59.31 42.977,61.747 v1(45.009,61.747) ; v1(44.933,31.344) 44.952,31.324 48.507,31.324 49.306,30.525 49.306,30.501 49.587,30.22 50.41,30.22 U1.30@50.615,30.015
  Bottom Layer w0.254: v1(44.933,31.344) 44.933,61.671 v1(45.009,61.747)
NetU1_34: U1.34 U13.21 | length 123.5
  Bottom Layer w0.254: U1.34@50.615,24.935 54.958,24.935 56.261,26.238 56.261,127.254 65.4,136.393 U13.21@65.4,139.75
NetU1_35: U1.35 U4.4 U5.4 U6.4 | length 89.6
  Top Layer w0.254: U6.4@29.288,89.286 31.542,89.286 v1(31.547,89.281) ; U4.4@29.491,60.61 32.416,60.61 32.906,61.1 32.906,61.43 v1(33.02,61.544) v1(37.922,61.544) ; U5.4@29.534,74.757 29.539,74.752 31.953,74.752 33.02,75.819 v1(33.02,75.971) ; v1(42.901,23.165) 43.663,22.403 44.196,22.403 44.204,22.395 U1.35@48.075,22.395
  Bottom Layer w0.254: v1(31.547,89.281) 33.02,87.808 v1(33.02,75.971) v1(33.02,61.544) ; v1(37.922,61.544) 42.901,56.566 v1(42.901,23.165)
NetU1_37: U1.37 U4.3 U5.3 U6.3 | length 93.5
  Top Layer w0.254: U6.3@29.288,88.636 30.769,88.636 31.725,87.681 v1(34.036,87.681) ; U4.3@29.491,59.96 33.417,59.96 v1(34.011,60.554) 37.109,60.554 v1(37.186,60.477) ; U5.3@29.534,74.107 33.34,74.107 v1(34.011,74.778) ; v1(41.758,20.472) 42.375,19.855 U1.37@48.075,19.855
  Bottom Layer w0.254: v1(34.011,60.554) v1(34.011,74.778) 34.036,74.803 v1(34.036,87.681) ; v1(37.186,60.477) 41.758,55.905 v1(41.758,20.472)
NetU1_62: U1.62 U3.12 | length 100.7
  Top Layer w0.254: v3(110.6,130.6) 110.618,130.582 110.618,128.342 U3.12@110.635,128.325 ; v3(117.7,107.1) v3(117.7,113.2)
  Bottom Layer w0.254: v3(110.6,130.6) 110.6,121.833 117.7,114.733 v3(117.7,113.2) ; U1.62@111.575,37.635 117.674,43.734 117.674,107.074 v3(117.7,107.1)
NetU1_72: U1.72 U2.12 | length 122.8
  Top Layer w0.254: U2.12@18.115,10.925 18.115,12.715 19.903,14.503 36.653,14.503 36.957,14.2 v1(37.1,14.2) ; v1(37.1,7.8) 40.9,7.8 46.303,2.397 97.495,2.397 100.292,5.194 101.978,5.194 102.413,4.76 v1(102.413,4.699)
  Bottom Layer w0.254: v1(37.1,7.8) v1(37.1,14.2) ; v1(102.413,4.699) 105.004,7.29 105.004,21.404 107.226,23.626 110.026,23.626 111.335,24.935 U1.72@111.575,24.935
NetU2_9: U2.9 U3.14 | length 205.5
  Top Layer w0.254: U2.9@14.305,10.925 14.305,12.405 14.8,12.9 16.913,12.9 19.202,15.189 59.283,15.189 59.5,15.406 v1(59.5,25.4) ; v1@59.512,120.512 61.504,122.504 101.342,122.504 105.481,126.643 107.559,126.643 108.095,127.179 U3.14@108.095,128.325
  Bottom Layer w0.254: v1(59.5,25.4) v1(59.5,120.5)
NetU4_14: U4.14 U5.2 | length 18.3
  Top Layer w0.254: U4.14@23.391,59.96 25.339,59.96 v1(25.349,59.969) ; v1(27.61,73.457) U5.2@29.534,73.457
  Bottom Layer w0.254: v1(25.349,59.969) 27.61,62.23 v1(27.61,73.457)
NetU5_14: U5.14 U6.2 | length 18.3
  Top Layer w0.254: U5.14@23.434,74.107 25.289,74.107 v1(25.298,74.117) ; v1(27.711,87.986) U6.2@29.288,87.986
  Bottom Layer w0.254: v1(25.298,74.117) 27.711,76.53 v1(27.711,87.986)
PA4: B1.3 B1.4 C1.2 R1.1 U1.32 | length 77.4
  Top Layer w0.254: C1.2@36.135,96.088 36.129,96.083 B1.3@36.129,92.764 B1.4@36.129,83.664 36.093,83.628 R1.1@36.093,80.4 36.128,80.366 37.668,80.366 38.557,79.477 v1(38.557,77.724) ; v1(46.228,28.727) 49.363,28.727 U1.32@50.615,27.475
  Bottom Layer w0.254: v1(38.557,77.724) 46.228,70.053 v1(46.228,28.727)
pads on no net: CN8.1 CN9.1 CN9.2 S1.3 U1.5 U1.7 U1.9 U1.10 U1.11 U1.12 U1.13 U1.14 U1.15 U1.18 U1.23 U1.24 U1.25 U1.26 U1.27 U1.29 U1.31 U1.33 U1.42 U1.45 U1.46 U1.48 U1.50 U1.52 U1.56 U1.59 U1.69 U1.73 U1.74 U1.75 U1.76 U6.14 U10.13 U12.3 U12.4 U12.5 U12.6 U12.7 U12.8 U12.9 U12.10 U12.11 U12.13 U12.14 U12.15 U12.16 U12.17 U12.18 U12.19 U12.20 U13.3 U13.6 U13.7 U13.8 U13.9 U13.10 U13.11 U13.12 U13.14 U13.15 U13.16 U13.18 U13.23

## Polygon pours and split planes (outlines as drawn)
GND on Bottom Layer "GND_POLY_BOTTOM" (solid, remove dead copper, pour order 1): 150,0 0,0 0,145 150,145
GND on Top Layer "GND_POLY_TOP" (solid, remove dead copper, pour order 0): 150,0 0,0 0,145 150,145

## Keep-outs
Keep-Out Layer:
  the board outline again, w2

## Silkscreen, mask and mechanical layers (free items; w line width, h text height)
Top Overlay:
  text "+6V_S1 is OK" at 66.929,119.295 h1.52
  text "+6V_S2 is OK" at 40.386,119.244 h1.52
  text "+5V is OK" at 100.051,118.635 h1.52
  text "LK Bulls" at 123.622,52.604 h1.52 r90
  text "RobonAUT 2023" at 126.314,52.604 h1.52 r90
Mechanical 1:
  the board outline again, w0.5

## Text inside footprints (layer, text, board x,y; h text height)
U1: Top Overlay "CN7" at 46.805,67.353 h1.52; Top Overlay "CN10" at 107.765,67.353 h1.52